# EAGLE board lighting_square (EAGLE 9.6.2)
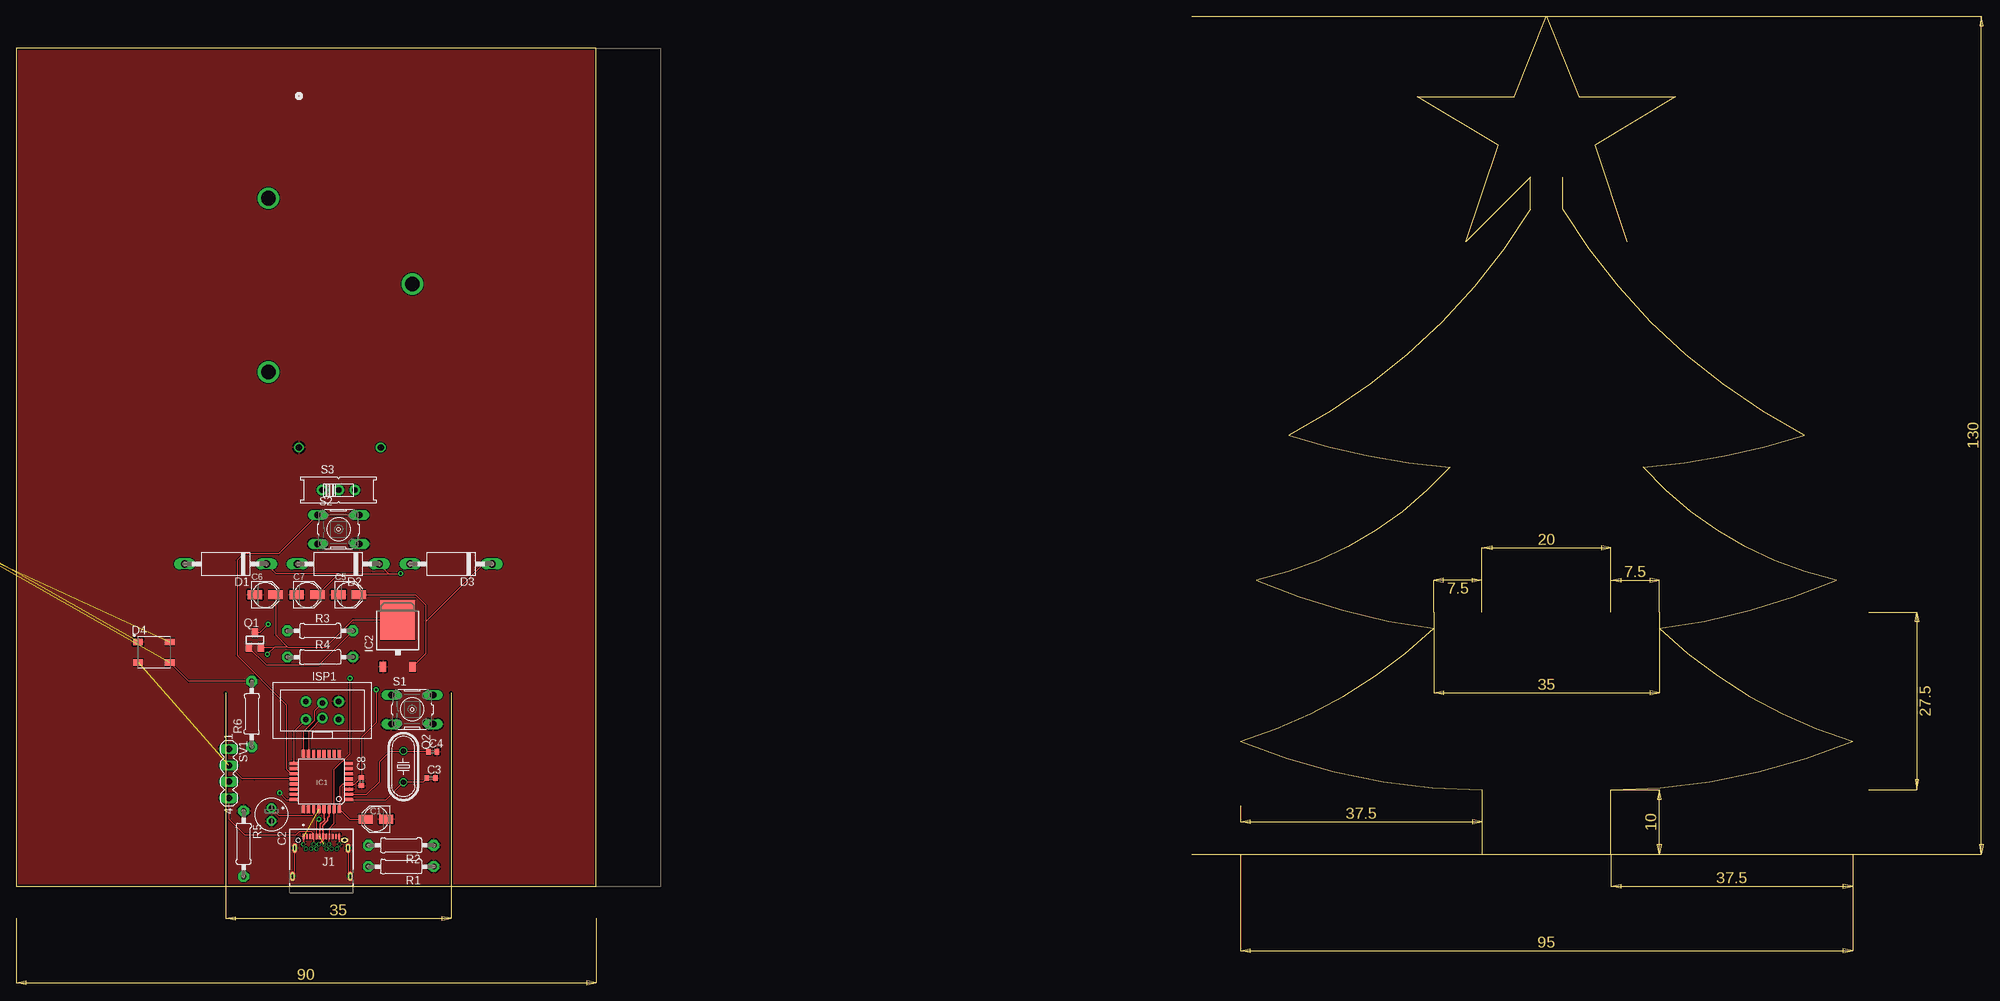
[diagram p0: board, top side]
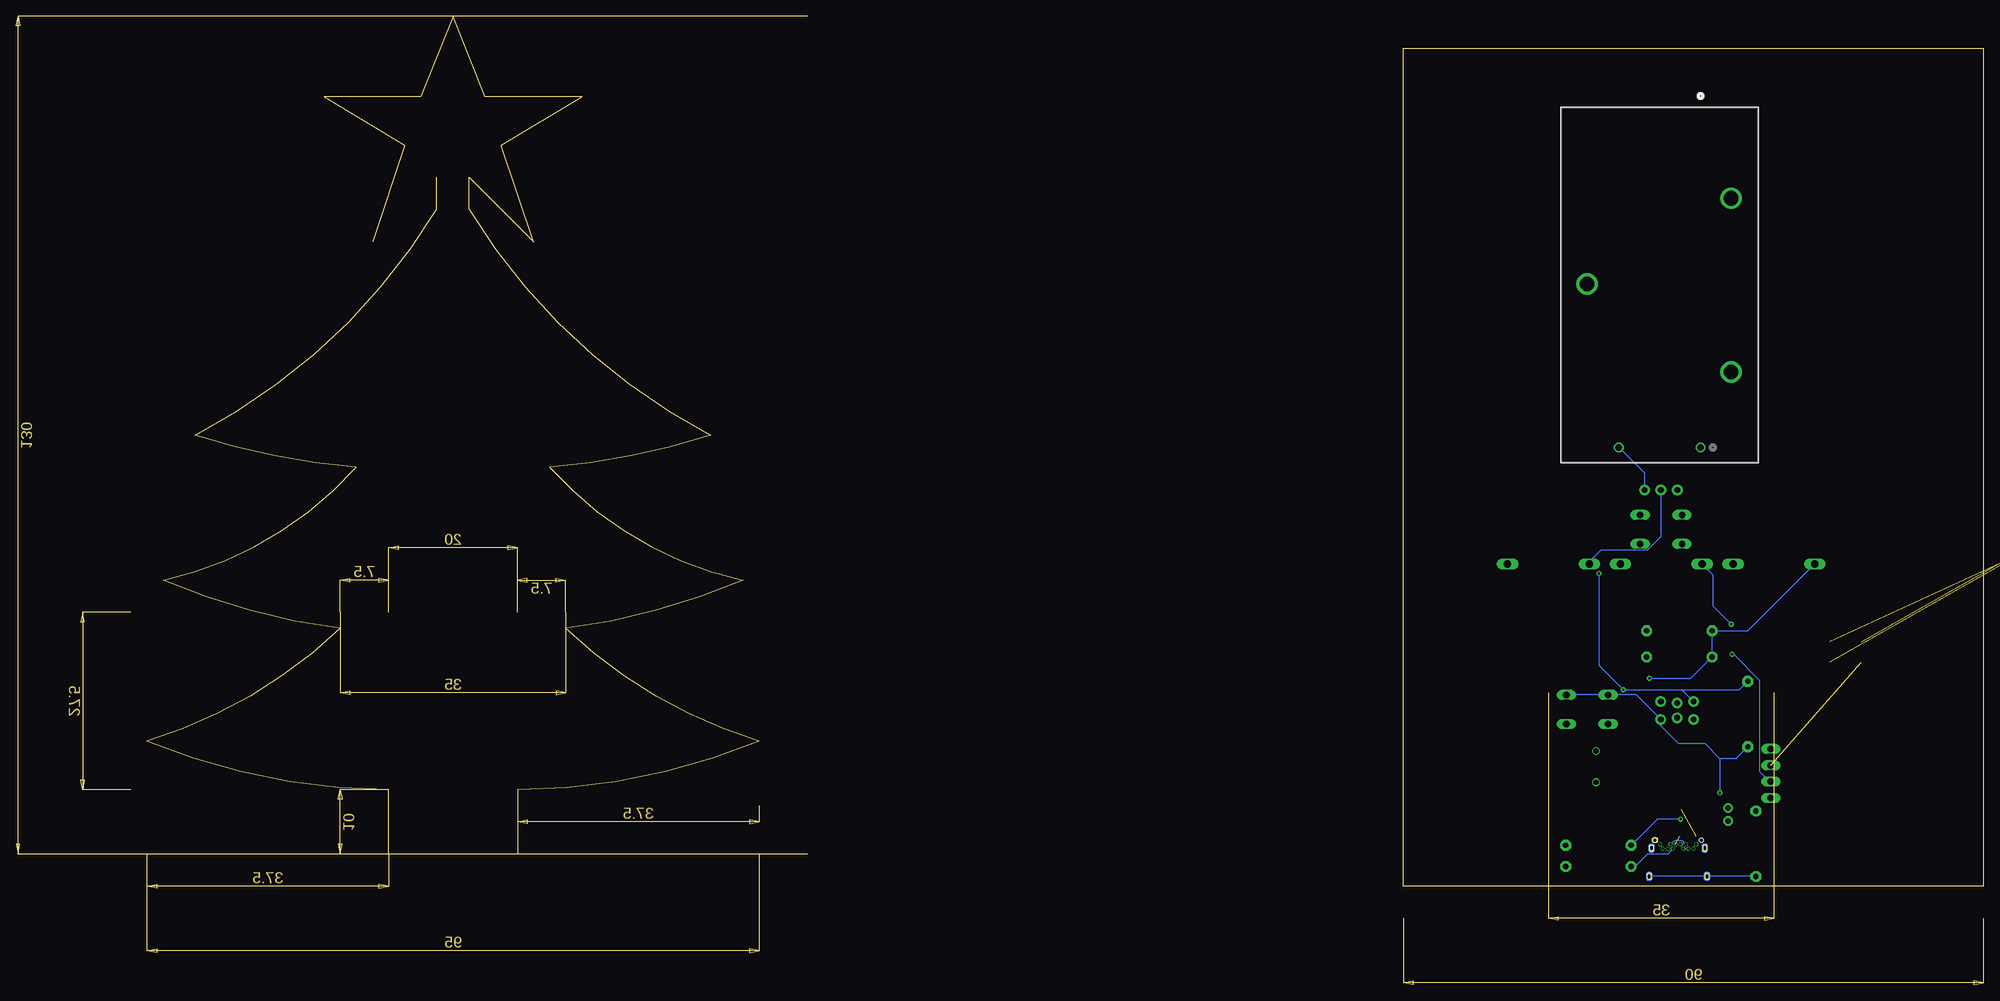
[diagram p1: board, bottom side, seen from below]

Size 285 x 135 mm. Coordinates in mm from the lower left corner, seen from the top.
Outline: 240,110 240,105 arc31 277.5,70 arc-14 252.5,65 arc36 282.5,47.5 arc-16 255,40 arc27 285,22.5 arc-22 247.5,15 247.5,5 227.5,5 227.5,15 arc-22 190,22.5 arc27 220,40 arc-16 192.5,47.5 arc36 222.5,65 arc-14 197.5,70 arc31 235,105 235,110 225,100 230,115 217.5,122.5 232.5,122.5 237.5,135 242.5,122.5 257.5,122.5 245,115 250,100
Outline: 0,0 90,0 90,130 0,130 0,0
Copper layers (1*16): Top 0.035mm / dielectric 1.5mm / Bottom 0.035mm
Design rules "default *": minimum track width 6mil, minimum drill 0.35mm, track to track 6mil, track to pad 6mil, pad to pad 6mil, via to via 6mil, smd to smd 6mil, copper to edge 10mil, drill to drill 6mil, minimum pad ring 0.1mm, minimum via ring 8mil, stop-mask expansion 4mil, vias tented up to drill 0mil, thermal gap 10mil
Net classes: 1 diff pairs: width 0.203 mm; 2 GND: clearance 0.254 mm to class 1

## Footprints (pad centres in the part's own frame; a part is rotated, then mirrored left to right if it is on the bottom)
PANASONIC_B = smd 2.2 x 1.4: + 1.6,0; - -1.6,0
E2-5 = drill 0.813 pad 1.422: + -1.016,0 | drill 0.813 pad 1.422 octagon: - 1.016,0
C0402 = smd 0.7 x 0.9: 1 -0.65,0; 2 0.65,0
DO15-12 = drill 1.118 long: A 6.35,0; C -6.35,0
LED_IN-PI554FCH = smd 1.5 x 1: 1 -2.45,1.6; 2 -2.45,-1.6; 3 2.45,-1.6; 4 2.45,1.6
TQFP32-08 = smd 1.27 x 0.508: 1 -4.293,2.8; 2 -4.293,2; 3 -4.293,1.2; 4 -4.293,0.4; 5 -4.293,-0.4; 6 -4.293,-1.2; 7 -4.293,-2; 8 -4.293,-2.8; 17 4.293,-2.8; 18 4.293,-2; 19 4.293,-1.2; 20 4.293,-0.4; 21 4.293,0.4; 22 4.293,1.2; 23 4.293,2; 24 4.293,2.8 | smd 0.508 x 1.27: 9 -2.8,-4.293; 10 -2,-4.293; 11 -1.2,-4.293; 12 -0.4,-4.293; 13 0.4,-4.293; 14 1.2,-4.293; 15 2,-4.293; 16 2.8,-4.293; 25 2.8,4.293; 26 2,4.293; 27 1.2,4.293; 28 0.4,4.293; 29 -0.4,4.293; 30 -1.2,4.293; 31 -2,4.293; 32 -2.8,4.293
DPACK = smd 1 x 1.6: 1 -2.28,-4.8; 3 2.28,-4.8 | smd 5.4 x 6.2: 2 0,2.5
AVRISP-BOX = drill 0.9 pad 1.626: 1 -1.397,2.54; 2 1.397,2.54; 3 -1.143,0; 4 1.143,0; 5 -1.397,-2.54; 6 1.397,-2.54
GCT_USB4056-03-A_REVA2 = smd 0.3 x 0.9: A1 -2.75,6.2; A2 -2.25,6.2; A3 -1.75,6.2; A4 -1.25,6.2; A5 -0.75,6.2; A6 -0.25,6.2; A7 0.25,6.2; A8 0.75,6.2; A9 1.25,6.2; A10 1.75,6.2; A11 2.25,6.2; A12 2.75,6.2 | drill 0.4 pad 0.6: B1 2.8,4.99; B2 2.4,4.29; B3 1.6,4.29; B4 1.2,4.99; B5 0.8,4.29; B6 0.4,4.99; B7 -0.4,4.99; B8 -0.8,4.29; B9 -1.2,4.99; B10 -1.6,4.29; B11 -2.4,4.29; B12 -2.8,4.99 | drill 0.5 pad 0.8: S1 -4.13,4.4; S2 4.13,4.4; S3 -4.49,0; S4 4.49,0 | hole 0.65: 3.6,5.64; -3.6,5.64
CONN_BH9VPC_MPD = drill 1.016 pad 1.524: 1 0,0; 2 0,-12.7 | drill 2.286 pad 2.286: 3 -38.684,4.75; 4 -11.709,4.75; 5 -25.349,-17.602
SUPER-SOT3 = smd 1 x 1.4: 1 -0.95,-1.1; 2 0.95,-1.1; 3 0,1.1
HC49U-V = drill 0.813: 1 -2.413,0; 2 2.413,0
0207/10 = drill 0.813 pad 1.676 octagon: 1 -5.08,0; 2 5.08,0
B3F-10XX = drill 1.016 long: 1 -3.251,2.261; 2 3.251,2.261; 3 -3.251,-2.261; 4 3.251,-2.261
EG1218 = drill 0.9 pad 1.676: O -2.54,0; P 0,0; S 2.54,0
MA04-1 = drill 1.016 long: 1 -3.81,0; 2 -1.27,0; 3 1.27,0; 4 3.81,0

## Placement (x,y rotation side)
C1  100nF  [PANASONIC_B]  55.83,10.41 180 top
C2  1µF  [E2-5]  39.62,11.13 270 top
C3  22pF  [C0402]  64.41,16.78 0 top
C4  22pF  [C0402]  64.67,20.85 0 top
C5  10µF  [PANASONIC_B]  51.61,45.21 0 top
C6  10µF  [PANASONIC_B]  38.66,45.21 0 top
C7  10µF  [PANASONIC_B]  45.16,45.21 0 top
C8  0.1µF  [C0402]  53.59,16.26 270 top
D1  1N5819  [DO15-12]  32.5,50 180 top
D2  1N5819  [DO15-12]  50,50 180 top
D3  1N5819  [DO15-12]  67.5,50 180 top
D4  IN-PI554FCH  [LED_IN-PI554FCH]  21.38,36.32 0 top
D5  IN-PI554FCH  [LED_IN-PI554FCH]  -28.8,64.79 0 top  (outside the outline)
D6  IN-PI554FCH  [LED_IN-PI554FCH]  -41.5,64.79 0 top  (outside the outline)
D7  IN-PI554FCH  [LED_IN-PI554FCH]  -52.43,75.2 0 top  (outside the outline)
D8  IN-PI554FCH  [LED_IN-PI554FCH]  -65.45,74.51 0 top  (outside the outline)
D9  IN-PI554FCH  [LED_IN-PI554FCH]  -52.53,63.5 0 top  (outside the outline)
D10  IN-PI554FCH  [LED_IN-PI554FCH]  -65.23,63.5 0 top  (outside the outline)
D11  IN-PI554FCH  [LED_IN-PI554FCH]  -28.8,74.95 0 top  (outside the outline)
D12  IN-PI554FCH  [LED_IN-PI554FCH]  -76.2,73.91 0 top  (outside the outline)
D13  IN-PI554FCH  [LED_IN-PI554FCH]  -76.2,64.52 0 top  (outside the outline)
IC1  ATMEGA32U2-TQFP  [TQFP32-08]  47.38,16.26 180 top
IC2  MC33269D 5V  [DPACK]  59.23,38.86 0 top
ISP1  AVRISP-BOX  [AVRISP-BOX]  47.53,27.27 90 top
J1  USB4056-03-A_REVA2  [GCT_USB4056-03-A_REVA2]  47.38,1.52 0 top
J2  BH9VPC 9V  [CONN_BH9VPC_MPD]  43.89,68.07 270 bottom
Q1  FDN360P  [SUPER-SOT3]  37.07,38.19 0 top
Q2  16MHz  [HC49U-V]  60.1,18.56 270 top
R1  5.1kΩ  [0207/10]  59.74,3.05 180 top
R2  5.1kΩ  [0207/10]  59.74,6.35 180 top
R3  220Ω  [0207/10]  47.2,39.62 180 top
R4  1MΩ  [0207/10]  47.2,35.56 180 top
R5  1MΩ  [0207/10]  35.31,6.6 270 top
R6  10kΩ  [0207/10]  36.58,26.72 90 top
S1  [B3F-10XX]  61.47,27.43 0 top
S2  [B3F-10XX]  50.04,55.37 0 top
S3  [EG1218]  50.04,61.47 0 top
SV1  [MA04-1]  33,17.49 270 top

## Library data of the parts
C1 C2 C5-C7 IC1 ISP1 R1-R6 S3 = adafruit
C3 C4 C8 = rcl; SPICEPREFIX: C
D1-D3 = diode
D4-D13 = IN-PI554FCH; MANUFACTURER: Inolux
IC2 = linear
J1 = USB4056-03-A_REVA2; MANUFACTURER: GCT; MAXIMUM_PACKAGE_HEIGHT: 3.31 mm; PARTREV: A2; SNAPEDA_PN: USB4056-03-A; STANDARD: Manufacturer Recommendations
J2 = components; COPYRIGHT: Copyright (C) 2024 Ultra Librarian. All rights reserved.; MANUFACTURER_PART_NUMBER: BH9VPC; MFR_NAME: Memory Protection Devices
Q1 = transistor-power
Q2 = crystal; OC_FARNELL: 1666969; OC_NEWARK: unknown
S1 S2 = switch-omron; MPN: B3F-1000; OC_FARNELL: 176432; OC_NEWARK: 36M3542
SV1 = con-lstb; OC_FARNELL: unknown; OC_NEWARK: unknown

## Nets
5V: C1.+ C7.+ C8.1 D1.C D2.C D4.3 D5.3 D6.3 D7.3 D8.3 D9.3 D10.3 D11.3 D12.3 D13.3 IC1.4 IC1.32 ISP1.2 R6.2
GND [GND]: C1.- C2.- C3.2 C4.2 C5.- C6.- C7.- C8.2 D4.1 D5.1 D6.1 D7.1 D8.1 D9.1 D10.1 D11.1 D12.1 D13.1 IC1.3 IC1.28 IC2.1 ISP1.6 J1.A1 J1.A12 J1.B1 J1.B12 J2.1 R1.1 R2.1 R4.1 R5.1 S1.3 S1.4 S2.3 S2.4 SV1.1
N$1: J1.A5 R2.2
N$2: D2.A Q1.3
N$3: J1.B5 R1.2
N$4: Q1.1 R3.1
N$5: J2.2 S3.S
N$6: C5.+ D3.C IC2.3
N$7: D4.4 D5.2
N$8: D5.4 D6.2
N$9: D6.4 D7.2
N$10: D7.4 D8.2
N$11: D8.4 D9.2
N$12: D9.4 D10.2
N$13: D10.4 D11.2
N$14: J1.S1 J1.S2 J1.S3 J1.S4 R5.2
N$15: D4.2 IC1.20 SV1.2
N$16: C2.+ IC1.27
N$17: D3.A S3.P
N$18: IC1.19 S2.1 S2.2
N$19: D11.4 D12.2
N$20: D12.4 D13.2
PGMR_MISO: IC1.17 ISP1.1
PGMR_MOSI: IC1.16 ISP1.4
PGMR_SCK: IC1.15 ISP1.3
RESET: IC1.24 ISP1.5 R6.1 S1.1 S1.2
USB_N [diff pairs]: IC1.30 J1.A7 J1.B7
USB_P [diff pairs]: IC1.29 J1.A6 J1.B6
VBAT: C6.+ IC2.2 Q1.2 SV1.3
VBUS: D1.A IC1.31 J1.A4 J1.A9 J1.B4 J1.B9 R3.2 R4.2 SV1.4
XTAL1: C3.1 IC1.1 Q2.2
XTAL2: C4.1 IC1.2 Q2.1

## Tracks (layer width: path | path; a pad name or v marks a point on that pad's centre or on a via)
5V  (via drill 0.35)  (9 unrouted)
  Top 0.152: C1.+ 51.73,10.41 IC1.32 50.18,15.38 50.65,15.86 IC1.4 52.54,15.86 C8.1 53.59,23.11 55.88,25.4 v55.88,30.48 | 50.07,48.51 55.17,48.51 57.84,48.51 | v59.69,48.51 58,48.51 57.84,48.51 | C7.+ 50.07,48.51 | R6.2 26.76,31.8 D4.3 | D1.C 40.34,48.51 50.07,48.51 | D2.C 57.84,48.51
  Bottom 0.152: v59.69,48.51 59.69,34.29 v55.88,30.48 46.8,30.48 | ISP1.2 46.8,30.48 | R6.2 37.89,30.48 46.8,30.48
GND  (10 unrouted)
  Top 0.152: J1.A12 50.13,6.56 J1.B1 | J1.A1 44.63,6.56 J1.B12
  pour Top: -6.35,-6.35 166.37,-6.35 166.37,156.68 -6.35,156.68
N$1  (via drill 0.35)
  Top 0.152: J1.A5 46.63,10.05 v46.99,10.41
  Bottom 0.152: v46.99,10.41 50.59,10.41 R2.2
N$2  (via drill 0.35)
  Top 0.152: v39.12,40.64 37.77,39.29 Q1.3
  Bottom 0.152: v39.12,40.64 41.91,43.43 41.91,48.26 D2.A
N$3
  Bottom 0.152: J1.B5 49.01,4.98 52.18,4.98 54.12,3.05 R1.2
N$4
  Top 0.152: R3.1 46.94,34.29 38.86,34.29 36.12,37.04 Q1.1
N$5
  Bottom 0.152: 52.58,61.72 S3.S 52.58,64.06 J2.2
N$6
  Top 0.152: C5.+ 61.98,45.21 63.55,43.64 63.55,41 | 63.55,41 63.55,36.1 IC2.3 | 63.55,41 72.55,50 D3.C
N$7  (1 unrouted)
N$8  (1 unrouted)
N$9  (1 unrouted)
N$10  (1 unrouted)
N$11  (1 unrouted)
N$12  (1 unrouted)
N$13  (1 unrouted)
N$14
  Top 0.152: J1.S2 51.51,1.88 J1.S4 | J1.S3 43.25,1.88 J1.S1
  Bottom 0.152: R5.2 J1.S3 J1.S4
N$15  (1 unrouted)
  Top 0.152: IC1.20 37,16.66 35.1,16.66 SV1.2
N$16
  Top 0.152: IC1.27 46.18,11.12 45.97,10.92 40.85,10.92 C2.+
N$17
  Bottom 0.152: S3.P 50.04,54.2 52.12,52.12 59.34,52.12 61.15,50.32 D3.A
N$18
  Top 0.152: S2.2 S2.1 40.72,51.56 35.31,51.56 34.29,50.55 34.29,35.81 41.91,28.19 41.91,18.22 42.67,17.46 IC1.19
N$19  (1 unrouted)
N$20  (1 unrouted)
PGMR_MISO
  Top 0.152: ISP1.1 43.08,23.97 IC1.17
PGMR_MOSI
  Top 0.152: ISP1.4 46.28,27.17 46.28,25.7 44.58,23.99 IC1.16
PGMR_SCK
  Top 0.152: ISP1.3 45.38,23.98 IC1.15
RESET  (via drill 0.35)
  Top 0.152: v40.89,14.48 41.92,13.46 IC1.24
  Bottom 0.152: 40.89,19.81 43.18,22.1 47.24,22.1 50.07,24.92 ISP1.5 53.88,29.69 S1.1 S1.2 | 40.89,19.81 38.4,19.81 R6.1 | 40.89,19.81 v40.89,14.48
USB_N
  Top 0.203: IC1.30 48.58,10.83 48.35,10.61 48.35,10.24 48.2,10.09 48.2,10.05 47.55,9.4 47.55,8.65 47.63,8.58 J1.A7 47.63,7.16 J1.B7
USB_P  (1 unrouted)
  Top 0.203: J1.A6 47.13,8.58 47.2,8.65 47.2,9.59 47.87,10.26 47.87,10.44 47.78,10.54 IC1.29
VBAT  (via drill 0.35)
  Top 0.152: Q1.2 40.09,37.09 | 42.16,37.09 40.09,37.09 | 42.16,37.09 48.02,37.09 52.28,41.36 IC2.2 | C6.+ 40.26,39 42.16,37.09 | 40.09,37.09 v39,36
  Bottom 0.152: v39,36 38.77,36 34.76,31.98 34.76,17.85 33.12,16.22 SV1.3
VBUS  (via drill 0.35)
  Top 0.152: J1.B9 46.18,7.67 J1.A4 46.01,7.84 46.01,8.27 45.77,8.5 44,8.5 43.5,8 35.5,8 33,10.5 SV1.4 | J1.B4 48.58,7.67 J1.A9 48.63,9 49.38,9.75 IC1.31 49.38,18.13 51.82,20.57 v51.82,32.26
  Bottom 0.152: J1.B9 46.23,6.51 46.76,7.04 47.99,7.04 48.52,6.51 J1.B4 | v51.82,32.26 45.42,32.26 R4.2 R3.2 36.53,39.62 D1.A
XTAL1
  Top 0.152: IC1.1 57.41,13.46 Q2.2 63.13,16.15 C3.1
XTAL2
  Top 0.152: IC1.2 54.4,14.26 56.39,16.25 56.39,19.3 58.06,20.97 Q2.1 64.02,20.97 C4.1